# Altium PCB ESP32_CAN.PcbDoc
Units mil, origin at the board's own origin, x right, y up, seen from the top; angles counter-clockwise.
Board outline 3135 x 1300 mil, 2 copper layers (Top Layer, Bottom Layer); 54 components, 58 nets, 237 pads, 59 vias.
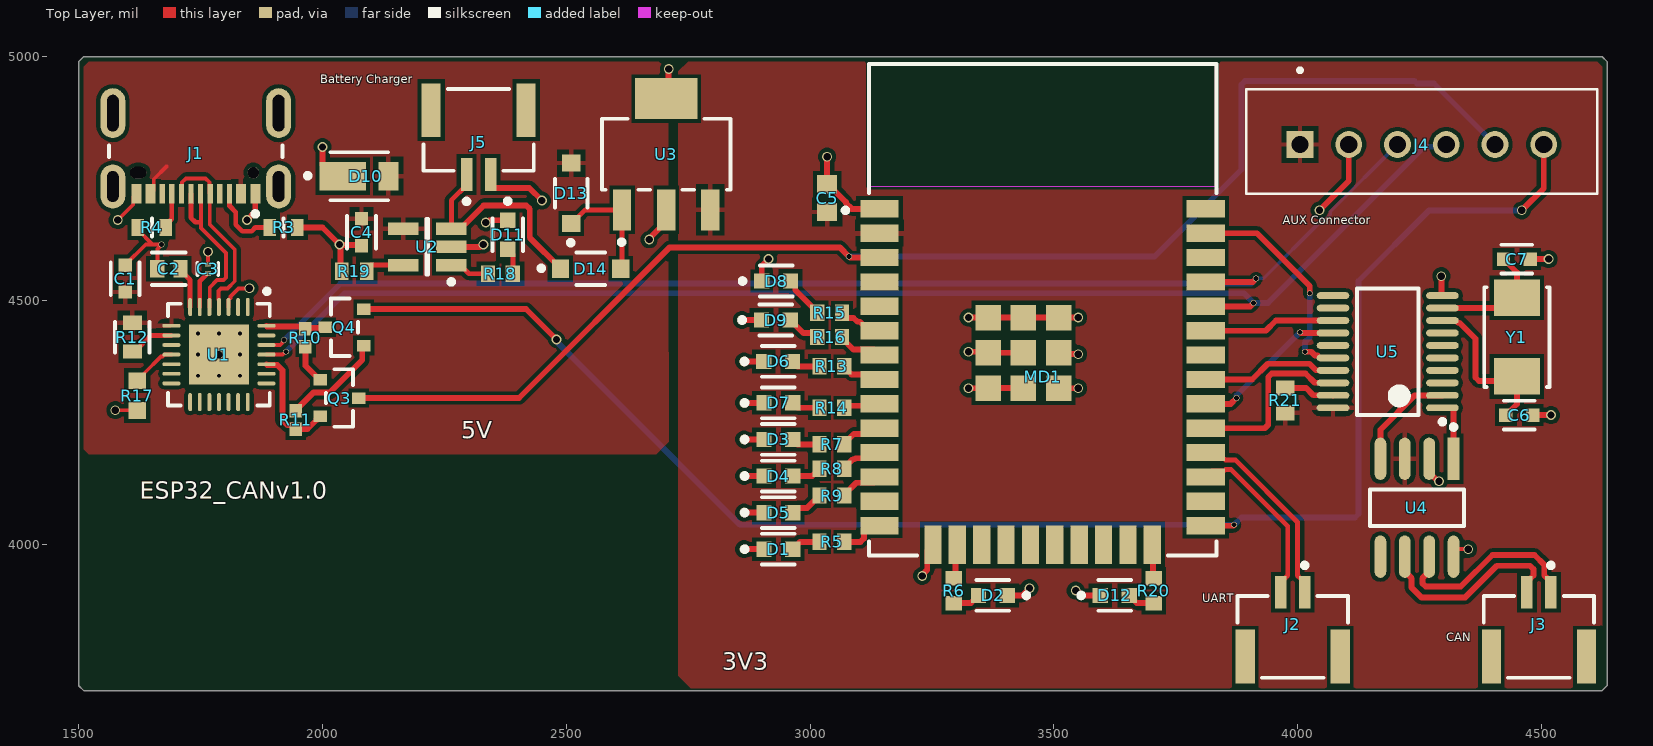
[diagram p0: Top Layer view]
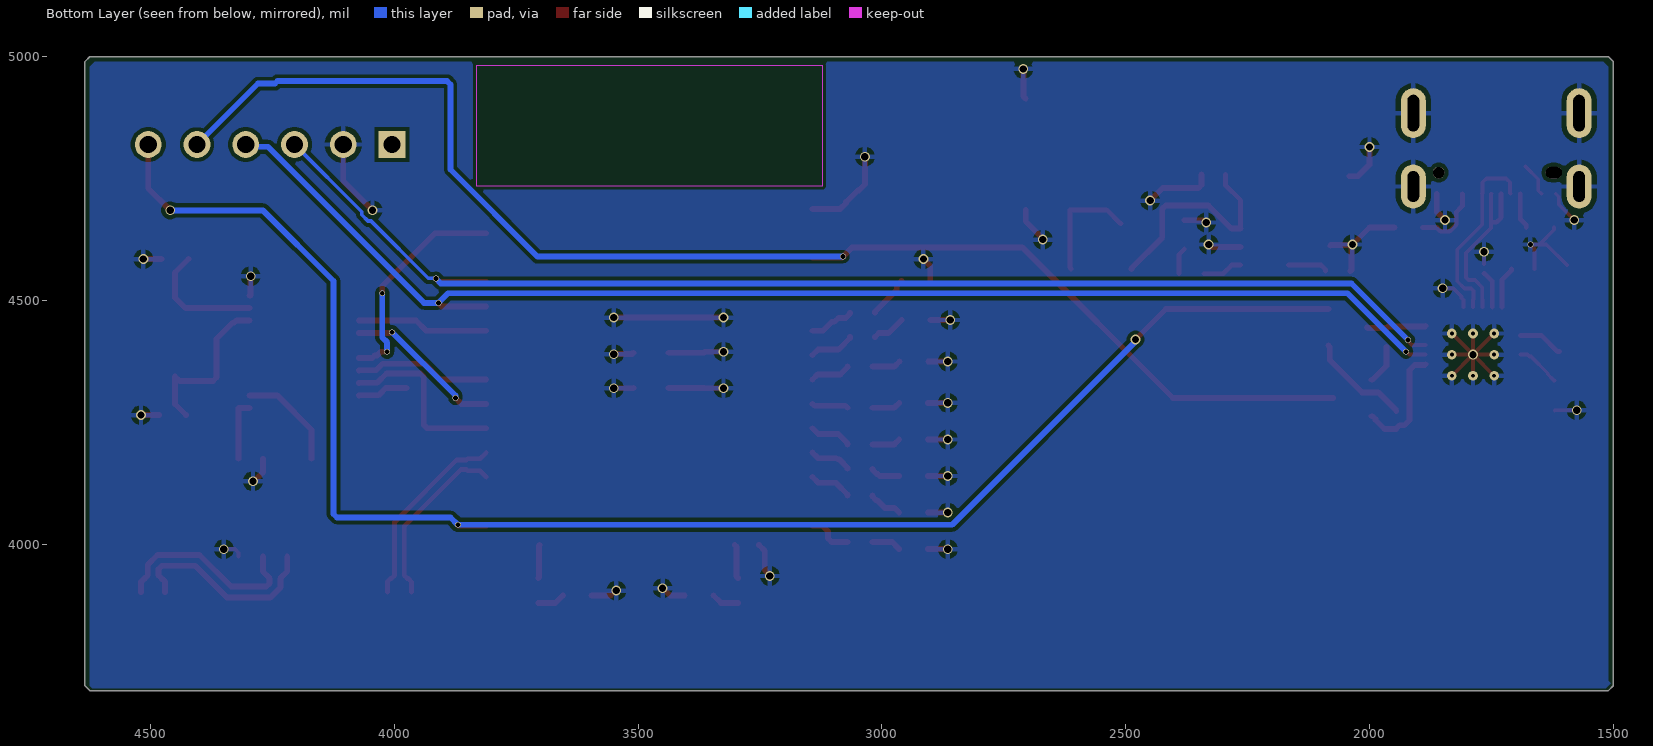
[diagram p1: Bottom Layer view, seen from below]
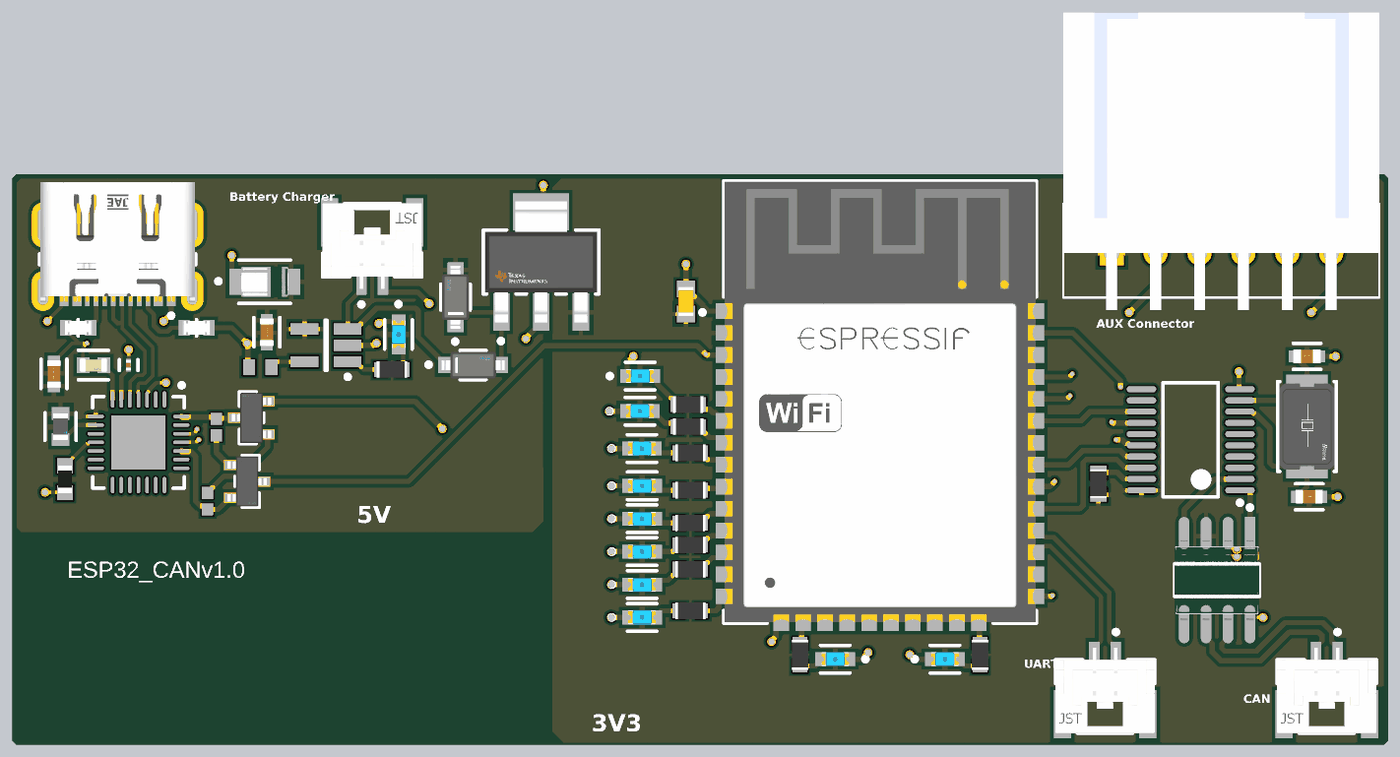
[diagram p2: 3D render of the assembled board from above, using the file's embedded part models]

## Layer stack, top to bottom
Top Solder: solder mask 0.4, Solder Resist, Dk 3.5
Top Layer: signal copper 1.4
Dielectric 1: dielectric 12.6, FR-4, Dk 4.8
Bottom Layer: signal copper 1.4
Bottom Solder: solder mask 0.4, Solder Resist, Dk 3.5

## Board outline
1500,3710 1500,4990 1510,5000 4625,5000 4635,4990 4635,3710 4625,3700 1510,3700

## Design rules (kind name [scope] priority, off if disabled: settings)
Clearance [All] p1: gap=8 ignorepadtopadclearanceinfootprint=FALSE
DiffPairsRouting [All] p1: maxlimit=10 minlimit=10 mostfreqgap=10 toplayer_minwidth=8 toplayer_maxwidth=15 toplayer_prefwidth=8 bottomlayer_minwidth=8 bottomlayer_maxwidth=15 bottomlayer_prefwidth=8 maxuncoupledlength=500
PolygonConnect [All] p1: connectstyle=Relief reliefconductorwidth=10 reliefentries=4 polygonreliefangle="90 Angle" airgapwidth=10
RoutingVias [All] p1: holewidth=12 width=15 viastyle="Through Hole" minholewidth=10 minwidth=12 maxholewidth=15 maxwidth=20
SolderMaskExpansion [All] p1: expansion=4 istentingtop=FALSE
Width [All] p1: maxlimit=12 minlimit=8 preferedwidth=10
29 further rules are at their usual default settings.

## Classes and differential pairs
differential pair UART: +UART_P -UART_N
differential pair D: +D_P -D_N
differential pair CAN: +CAN_P -CAN_N

## Components (designator, comment, footprint, x,y, rotation, side; value= is the part's Value field where it differs from the comment)
C1 "TMK107B7105KA-T" FP-0603-L_1_6_0_1-W_0_8_0-MFG 1595,4545 r90 top
C2 "C0603C104K5RACTU" FP-C0603C-CF-MFG 1685,4565 r180 top value="0.10 μF"
C3 "GRM033R60J104KE19D" FP-GRM033-0_03-MFG 1765,4565 r90 top
C4 "TMK107B7105KA-T" FP-0603-L_1_6_0_1-W_0_8_0-MFG 2080,4640 r270 top
C5 "GRM188R71H104KA93D" CAPC1608X90X35ML10T15 3035,4710 r90 top
C6 "C1608C0G1H220J080AA" FP-C1608-080-0_1-MFG 4455,4265 r0 top
C7 "C1608C0G1H220J080AA" FP-C1608-080-0_1-MFG 4450,4585 r0 top
D1 "LTST-C191TBKT" FP-LTST-C191TBKT-MFG 2935,3990 r0 top
D2 "LTST-C191TBKT" FP-LTST-C191TBKT-MFG 3375,3895 r180 top
D3 "LTST-C191TBKT" FP-LTST-C191TBKT-MFG 2935,4215 r0 top
D4 "LTST-C191TBKT" FP-LTST-C191TBKT-MFG 2935,4140 r0 top
D5 "LTST-C191TBKT" FP-LTST-C191TBKT-MFG 2935,4065 r0 top
D6 "LTST-C191TBKT" FP-LTST-C191TBKT-MFG 2934.53,4375 r0 top
D7 "LTST-C191TBKT" FP-LTST-C191TBKT-MFG 2935,4290 r0 top
D8 "LTST-C191TBKT" FP-LTST-C191TBKT-MFG 2930.47,4540 r0 top
D9 "LTST-C191TBKT" FP-LTST-C191TBKT-MFG 2930,4460 r0 top
D10 "DFLS1200Q-7" FP-PowerDI123-MFG 2074.96,4755 r180 top value=23pF
D11 "LTST-C191TBKT" FP-LTST-C191TBKT-MFG 2380,4635 r270 top
D12 "LTST-C191TBKT" FP-LTST-C191TBKT-MFG 3625,3895 r0 top
D13 "1N5819HW-7-F" FP-SOD123-MFG 2510,4720 r90 top
D14 "1N5819HW-7-F" FP-SOD123-MFG 2550,4565 r0 top
J1 "DX07S016JA1R1500" FP-DX07S016JA1R1500-MFG 1740,4845 r180 top
J2 "BM02B-GHS-TBT(LF)(SN)(N)" FP-BM02B-GHS-TBT_LF_SN-MFG 3990,3810 r0 top
J3 "BM02B-GHS-TBT(LF)(SN)(N)" FP-BM02B-GHS-TBT_LF_SN-MFG 4495,3810 r0 top
J4 "5-103414-4" TE_5-103414-4 4255,4820 r0 top
J5 "BM02B-GHS-TBT(LF)(SN)(N)" FP-BM02B-GHS-TBT_LF_SN-MFG 2320,4850 r180 top
MD1 "ESP32-WROOM-32D" FP-ESP32-WROOM-32D-MFG 3477.13,4480.94 r0 top
Q3 "BC817-25,215" FP-SOT23-MFG 2035,4300 r0 top
Q4 "BC817-25,215" FP-SOT23-MFG 2045,4445 r180 top
R3 "ERJ-3EKF5101V" FP-ERJ3EK-MFG 1920,4650 r0 top
R4 "ERJ-3EKF5101V" FP-ERJ3EK-MFG 1650,4650 r180 top
R5 "ERJ-3EKF2200V" RESC1608X55X30LL15T15 3045,4005 r180 top
R6 "ERJ-3EKF2200V" RESC1608X55X30LL15T15 3295,3905 r270 top
R7 "ERJ-3EKF2200V" RESC1608X55X30LL15T15 3045,4205 r180 top
R8 "ERJ-3EKF2200V" RESC1608X55X30LL15T15 3045,4155 r180 top
R9 "ERJ-3EKF2200V" RESC1608X55X30LL15T15 3045,4100 r180 top
R10 "CRCW040210K0FKEDHP" RESC1005X40X25ML05T10 1965,4423.7 r270 top
R11 "CRCW040210K0FKEDHP" RESC1005X40X25ML05T10 1945,4255 r90 top
R12 "CRCW06034K70FKEA" FP-CRCW0603-e3-MFG 1610,4425 r270 top
R13 "ERJ-3EKF2200V" RESC1608X55X30LL15T15 3045,4365 r180 top
R14 "ERJ-3EKF2200V" RESC1608X55X30LL15T15 3045,4280 r180 top
R15 "ERJ-3EKF2200V" RESC1608X55X30LL15T15 3040,4475 r180 top
R16 "ERJ-3EKF2200V" RESC1608X55X30LL15T15 3040,4425 r180 top
R17 "CR0603AFX-1002EAS" RESC1608X55N 1620,4305 r270 top
R18 "ERJ-3EKF2200V" RESC1608X55X30LL15T15 2365,4555 r0 top
R19 "RK73H1JTTD1001F" RESC1608X55X30LL20T10 2065,4560 r180 top
R20 "ERJ-3EKF2200V" RESC1608X55X30LL15T15 3705,3905 r270 top
R21 "CRCW060310K0FKEA" RESC1609X50X30NL8T20 3975,4295 r270 top
U1 "CP2102-GM" SLAB-QFN-28-3125x3125TP_M 1787.56,4389.06 r270 top
U2 "LTC4054ES5-4.2#TRMPBF" LT-S5-5-TSOT-23_M 2215,4610 r180 top
U3 "LM3940IMP-3.3/NOPB" FP-DCY0004A-MFG 2705,4800 r90 top
U4 "TJA1050T/CM,118" FP-SOT96-1-IPC_A 4245,4075 r270 top
U5 "MCP2515-I/ST" TSSOP-ST20_N 4185,4395 r180 top
Y1 "ABM3-8.000MHZ-D2Y-T" FP-ABM3-MFG 4450,4425 r270 top

## Footprints (in the part's own frame and the unit in brackets; to place one, negate y for a bottom-side part, rotate by r counter-clockwise, add the part's x,y. Pads: shape width x height; smd on the part's side, far side on the other; paste and mask are expansions set on the pad)
CAPC1608X90X35ML10T15 [mm] "Chip Capacitor, 2-Leads, Body 1.7x0.9mm, IPC Low Density"
  rect 0.95x1.05 smd: 1(-0.725,0) 2(0.725,0)
  body extent -0.85,-0.45 0.85,0.45, height 0.9
FP-0603-L_1_6_0_1-W_0_8_0-MFG [mm]
  rect 0.7x0.7 smd paste+0 mask+0: 1(-0.7,0) 2(0.7,0)
  silkscreen extent -0.85,-0.75 0.85,0.75, body extent -1.15,-0.55 1.15,0.55, height 0.25
FP-ABM3-MFG [mm]
  rect 1.9x2.4 smd paste+0 mask+0: 1(-2.05,0) 2(2.05,0)
  silkscreen extent -2.6,-1.7 2.6,1.7, body extent -3.1,-1.8 3.1,1.8, height 0.25
FP-BM02B-GHS-TBT_LF_SN-MFG [mm]
  rect 0.6x1.7 smd paste+0 mask+0: 1(0.625,2.325) 2(-0.625,2.325)
  rect 1x2.8 smd paste+0 mask+0: 3(-2.475,-1.025) 4(2.475,-1.025)
  silkscreen extent -2.88,-2.12 2.88,3.85, body extent -3.08,-2.52 3.08,3.27, height 0.25
FP-C0603C-CF-MFG [mm]
  rect 0.75x0.9 smd paste+0 mask+0: 1(-0.6,0) 2(0.6,0)
  silkscreen extent -0.87,-0.85 0.88,0.85, body extent -1.2,-0.6 1.2,0.6, height 0.25
FP-C1608-080-0_1-MFG [mm]
  rect 0.7x0.7 smd paste+0 mask+0: 1(-0.7,0) 2(0.7,0)
  silkscreen extent -0.8,-0.75 0.8,0.75, body extent -1.15,-0.55 1.15,0.55, height 0.25
FP-CRCW0603-e3-MFG [mm]
  rect 0.75x1 smd paste+0 mask+0: 1(-0.75,0) 2(0.75,0)
  silkscreen extent -0.8,-0.9 0.8,0.9, body extent -1.22,-0.6 1.22,0.6, height 0.25
FP-DCY0004A-MFG [mm]
  rect 2.15x0.95 smd paste+0 mask+0: 1(-2.9,2.3) 2(-2.9,0) 3(-2.9,-2.3)
  rect 2.15x3.25 smd paste+0 mask+0: 4(2.9,0)
  silkscreen extent -4.7,-3.35 1.85,3.35, body extent -4.08,-3.45 4.08,3.45, height 0.25
FP-DX07S016JA1R1500-MFG [mm]
  rrect100% 1.3x2.3 hole 1.6 slot 0.6 at 0 deg paste-2539.97 mask+0: 1(-4.32,2.825) 2(4.32,2.825)
  rrect100% 1.3x2.6 hole 1.9 slot 0.6 at 0 deg paste-2539.97 mask+0: 3(-4.32,-1) 6(4.32,-1)
  rect 0.52x1 smd paste+0 mask+0: A1/B12(-3.1,3.2) A4/B9(-2.35,3.2) A12/B1(3.1,3.2) B4/A9(2.35,3.2)
  rect 0.27x1 smd paste+0 mask+0: A5(-1.75,3.2) A6(-0.25,3.2) A7(0.75,3.2) A8(1.75,3.2) B5(1.25,3.2) B6(0.25,3.2) B7(-0.75,3.2) B8(-1.25,3.2)
  round 0.6 hole 0.6 unplated paste-2539.97 mask+0: ""(-3,2.1)
  rrect100% 0.85x0.6 hole 0.6 slot 0.85 at 0 deg unplated paste-2539.97 mask+0: ""(3,2.1)
  silkscreen extent -4.52,0.67 4.52,4.37, body extent -5.07,-3.75 5.07,4.08, height 0.25
FP-ERJ3EK-MFG [mm]
  rect 0.65x0.9 smd paste+0 mask+0: 1(-0.725,0) 2(0.725,0)
  silkscreen extent 0,-0.48 0,0.48, body extent -1.15,-0.58 1.15,0.58, height 0.25
FP-ESP32-WROOM-32D-MFG [mm]
  rect 2x0.9 smd paste+0 mask+0: 1(-8.5,5.26) 2(-8.5,3.99) 3(-8.5,2.72) 4(-8.5,1.45) 5(-8.5,0.18) 6(-8.5,-1.09) 7(-8.5,-2.36) 8(-8.5,-3.63) 9(-8.5,-4.9) 10(-8.5,-6.17) 11(-8.5,-7.44) 12(-8.5,-8.71) 13(-8.5,-9.98) 14(-8.5,-11.25) 25(8.5,-11.25) 26(8.5,-9.98) 27(8.5,-8.71) 28(8.5,-7.44) 29(8.5,-6.17) 30(8.5,-4.9) 31(8.5,-3.63) 32(8.5,-2.36) 33(8.5,-1.09) 34(8.5,0.18) 35(8.5,1.45) 36(8.5,2.72) 37(8.5,3.99) 38(8.5,5.26)
  rect 0.9x2 smd paste+0 mask+0: 15(-5.715,-12.25) 16(-4.445,-12.25) 17(-3.175,-12.25) 18(-1.905,-12.25) 19(-0.635,-12.25) 20(0.635,-12.25) 21(1.905,-12.25) 22(3.175,-12.25) 23(4.445,-12.25) 24(5.715,-12.25)
  rect 1.33x1.33 smd paste+0 mask+0: 39(-2.835,-4.075) 39(-2.835,-2.24) 39(-2.835,-0.405) 39(-1,-4.075) 39(-1,-2.24) 39(-1,-0.405) 39(0.835,-4.075) 39(0.835,-2.24) 39(0.835,-0.405)
  Keep-Out Layer region: -9,6.45 9,6.45 9,12.75 -9,12.75
  Keep-Out Layer region: -9,6.45 9,6.45 9,12.75 -9,12.75
  silkscreen extent -10.4,-12.8 9.05,12.8, body extent -9.6,-13.35 9.6,12.9, height 0.25
FP-GRM033-0_03-MFG [mm]
  rect 0.25x0.3 smd paste+0 mask+0: 1(-0.238,0) 2(0.238,0)
  silkscreen extent -0.32,-0.54 0.32,0.54, body extent -0.46,-0.27 0.46,0.27, height 0.25
FP-LTST-C191TBKT-MFG [mm]
  rect 0.8x0.8 smd paste+0 mask+0: 1(-0.75,0) 2(0.75,0)
  silkscreen extent -1.87,-0.8 0.85,0.8, body extent -1.25,-0.55 1.25,0.55, height 0.25
FP-PowerDI123-MFG [mm]
  rect 2.4x1.5 smd paste+0 mask+0: 1(0.85,0)
  rect 1.05x1.5 smd paste+0 mask+0: 2(-1.525,0)
  silkscreen extent -1.5,-1.25 2.8,1.25, body extent -2.15,-1.06 2.15,1.06, height 0.25
FP-SOD123-MFG [mm]
  rect 0.9x0.95 smd paste+0 mask+0: 1(-1.575,0) 2(1.575,0)
  silkscreen extent -2.7,-0.85 0.75,0.85, body extent -2.12,-0.95 2.12,0.95, height 0.25
FP-SOT23-MFG [mm]
  rect 0.7x0.6 smd paste-1000 mask+0: 1(-1,0.95) 2(-1,-0.95) 3(1,0)
  silkscreen extent -0.7,-1.5 0.7,1.5, body extent -1.5,-1.65 1.5,1.65, height 0.25
FP-SOT96-1-IPC_A [mil]
  rect 86.79x23.94 smd paste+0 mask+0: 1(-100.43,75)
  rrect100% 86.79x23.94 smd paste+0 mask+0: 2(-100.43,25) 3(-100.43,-25) 4(-100.43,-75) 5(100.43,-75) 6(100.43,-25) 7(100.43,25) 8(100.43,75)
  silkscreen extent -170,-96 37,96, body extent -164,-116 164,116, height 10
LT-S5-5-TSOT-23_M [mm] "SOT23, 5-Leads, Body 2.90x1.63mm, Pitch 0.95mm, IPC Low Density"
  rect 1.6x0.65 smd: 1(-1.25,0.95) 2(-1.25,0) 3(-1.25,-0.95) 4(1.25,-0.95) 5(1.25,0.95)
  silkscreen extent -1.38,-1.45 0.05,1.95, body extent -0.87,-1.45 0.87,1.45, height 1
RESC1005X40X25ML05T10 [mm] "Chip Resistor, 2-Leads, Body 1.00x0.50mm, IPC Low Density"
  rect 0.7x0.65 smd: 1(-0.475,0) 2(0.475,0)
  body extent -0.53,-0.27 0.53,0.28, height 0.4
RESC1608X55N [mm]
  rect 0.87x0.93 smd: 1(-0.78,0) 2(0.78,0)
  body extent -0.8,-0.4 0.8,0.4, height 0.55
RESC1608X55X30LL15T15 [mm] "Chip Resistor, 2-Leads, Body 1.75x0.95mm, IPC High Density"
  rect 0.75x0.85 smd: 1(-0.65,0) 2(0.65,0)
  body extent -0.87,-0.48 0.87,0.48, height 0.55
RESC1608X55X30LL20T10 [mm] "Chip Resistor, 2-Leads, Body 1.60x0.80mm, IPC High Density"
  rect 0.7x0.9 smd: 1(-0.65,0) 2(0.65,0)
  body extent -0.9,-0.5 0.9,0.5, height 0.55
RESC1609X50X30NL8T20 [mm] "Chip Resistor, 2-Leads, Body 1.65x0.95mm, IPC Medium Density"
  rect 0.8x0.95 smd: 1(-0.65,0) 2(0.65,0)
  body extent -0.82,-0.48 0.82,0.48, height 0.5
SLAB-QFN-28-3125x3125TP_M [mm] "QFN, 28-Leads, Body 5x5mm, Pitch 0.5mm, Thermal Pad 3.13x3.13mm, IPC Low Density"
  oval 0.95x0.2 smd: 1(-2.475,1.5) 2(-2.475,1) 3(-2.475,0.5) 4(-2.475,0) 5(-2.475,-0.5) 6(-2.475,-1) 7(-2.475,-1.5) 15(2.475,-1.5) 16(2.475,-1) 17(2.475,-0.5) 18(2.475,0) 19(2.475,0.5) 20(2.475,1) 21(2.475,1.5)
  oval 0.2x0.95 smd: 8(-1.5,-2.475) 9(-1,-2.475) 10(-0.5,-2.475) 11(0,-2.475) 12(0.5,-2.475) 13(1,-2.475) 14(1.5,-2.475) 22(1.5,2.475) 23(1,2.475) 24(0.5,2.475) 25(0,2.475) 26(-0.5,2.475) 27(-1,2.475) 28(-1.5,2.475)
  rect 3.13x3.13 smd: 29(0,0)
  silkscreen extent -3.42,-2.65 2.65,2.65, body extent -2.5,-2.5 2.5,2.5, height 1
TE_5-103414-4 [mm]
  rect 1.398x1.398 hole 0.89: 1(-6.35,0)
  round 1.398 hole 0.89: 2(-3.81,0) 3(-1.27,0) 4(1.27,0) 5(3.81,0) 6(6.35,0)
  silkscreen extent -9.14,-2.57 9.14,3.97, body extent -9.14,-2.88 9.14,2.87, height 13.94
TSSOP-ST20_N [mm] "TSOP, 20-Leads, Body 6.5x4.4mm, Pitch 0.65mm, IPC Medium Density"
  oval 1.7x0.35 smd: 1(-2.85,2.925) 2(-2.85,2.275) 3(-2.85,1.625) 4(-2.85,0.975) 5(-2.85,0.325) 6(-2.85,-0.325) 7(-2.85,-0.975) 8(-2.85,-1.625) 9(-2.85,-2.275) 10(-2.85,-2.925) 11(2.85,-2.925) 12(2.85,-2.275) 13(2.85,-1.625) 14(2.85,-0.975) 15(2.85,-0.325) 16(2.85,0.325) 17(2.85,0.975) 18(2.85,1.625) 19(2.85,2.275) 20(2.85,2.925)
  silkscreen extent -2.98,-3.3 1.6,3.77, body extent -2.25,-3.3 2.25,3.3, height 1.2

## Part data
C1 C4: library part CMP-2000-07259-3, "None", Capacitance=1uF, Case Code (Imperial)=0603, Case Code (Metric)=1608, Dielectric=X7R, Max Operating Temperature=125°C, Min Operating Temperature=-55°C, Package Quantity=1, Resistor Type=Ceramic, Tolerance=10%, Voltage Rating=25V, Case/Package=0603, Construction=Flat, Contact Plating=Tin, Depth=0.8mm, Halogen Free="Halogen Free", Height=0.8mm, Length=1.6mm, Mount="Surface Mount", Number of Pins=2, Packaging="Tape and Reel", Radiation Hardening=No, REACH SVHC="No SVHC", RoHS Compliant=Yes, Series=M, Termination=SMD/SMT, Thickness=0.035inch, Voltage Rating (DC)=25V, Width=0.031inch
C2: library part CMP-2006-03061-2, "CAP CER 0.1UF 50V X7R 0603", Capacitance="0.10 μF", Manufacturer=KEMET, Package=C0603C-CF, Temperature="-55°C to +125°C", Temperature Characteristic=X7R, Temperature Coefficient=30ppm/°C, Temperature Range High=+125°C, Temperature Range Low=-55°C, Tolerance=0.1, Voltage Rating="50 V", Automotive=Yes, Automotive Grade="Grade 1", Category=Cap, ComponentLink2Description=Datasheet, ComponentLink2URL=https://api.kemet.com/component-edge/download/datasheet/C0603C100J5GACAUTO.pdf, Device Class L1="Passive Components", Device Class L2=Capacitors, Device Class L3="Ceramic Capacitors", Digikey Description="CAP CER 0.1UF 50V X7R 0603", Height=0.87mm, Lead Free=Yes, Manufacturer Part Number=C0603C104K5RACTU, Material=Ceramic, Octopart=https://octopart.com/c0603c104k5ractu-kemet-139244, RoHS=TRUE
C3: library part CMP-06035-000062-2, "Chip Multilayer Ceramic Capacitors for General Purpose, 0201, 0.10uF, X5R, 15%, 10%, 6.3V", Capacitance=100nF, Case Code (Imperial)=0201, Case Code (Metric)=0603, Dielectric=X5R, Max Operating Temperature=85°C, Min Operating Temperature=-55°C, Package Quantity=1, Tolerance=10%, Voltage=6.3V, Case/Package=0201, Depth=0.3mm, Height=0.3mm, Lead Free="Lead Free", Length=0.6mm, Material=Ceramic, Mount="Surface Mount", Packaging="Tape and Reel", Radiation Hardening=No, REACH SVHC="No SVHC", Termination=SMD/SMT, Thickness=0.013inch, Voltage Rating=6.3V, Voltage Rating (DC)=6.3V, Weight=6E-06oz, Width=0.012inch
C5: library part CMP-2100-03643-1, "Chip Capacitor, 0.1 uF, +/- 10%, 50 V, -55 to 125 degC, 0603 (1608 Metric), RoHS, Tape and Reel", Capacitance=100nF, Case Code (Imperial)=0603, Case Code (Metric)=1608, Dielectric=X7R, Dielectric Material=Ceramic, Insulation Resistance=10GR, Manufacturer=Murata, Max Operating Temperature=125degC, Min Operating Temperature=-55degC, Package Description="2-Pin Surface Mount Device, Body 1.6 x 0.8 mm", Package Quantity=1, Tolerance=10%, Voltage=50V, Case/Package=0603, Contact Plating=Tin, Datasheet URL=http://psearch.en.murata.com/capacitor/product/GRM188R71H104KA93%23.pdf, Datasheet Version=42675.0, Depth=0.8mm, Height=0.8mm, Lead Free=LeadFree, Length=1.6mm, Manufacturer URL=http://www.murata.com/, Material=Ceramic, Mount=SurfaceMount, Number of Pins=2, Package Reference=0603, Packaging=TapeandReel, Radiation Hardening=No, REACH SVHC=NoSVHC, RoHSCompliant=true, Termination=SMD/SMT, Thickness=0.035inch, Voltage Rating=50V, Voltage Rating (DC)=50V, Width=0.8mm
C6 C7: library part CMP-2000-06024-2, "CAP CER 22PF 50V C0G 0603", Capacitance=22pF, Case Code (Imperial)=0603, Case Code (Metric)=1608, Dielectric=C0G, Dielectric Material=Ceramic, Max Operating Temperature=125°C, Min Operating Temperature=-55°C, Package Quantity=1, Temperature Coefficient=30ppm/°C, Tolerance=5%, Voltage=50V, Case/Package=0603, Construction=Flat, Depth=0.8mm, Height=0.8mm, Lead Free="Lead Free", Length=1.6mm, Mount="Surface Mount", Number of Pins=2, Packaging="Tape and Reel", Radiation Hardening=No, RoHS Compliant=Yes, Series=C, Termination=SMD/SMT, Thickness=0.037inch, Voltage Rating=50V, Voltage Rating (DC)=50V, Weight=7.1E-05oz, Width=0.031inch
D1 D2 D3 D4 D5 D6 D7 D8 D9 D11 D12: library part CMP-22017-000008-1, "LED BLUE CLEAR CHIP SMD", Case Code (Imperial)=0603, Case Code (Metric)=1608, Color=Blue, Forward Current=20mA, Forward Voltage=3.8V, Lens Color=Colorless, Max Operating Temperature=80°C, Max Power Dissipation=75mW, Min Operating Temperature=-20°C, Package Quantity=1, Power Dissipation=76mW, Reverse Voltage=5V, Case/Package=0603, Depth=1.6mm, Dominant Wavelength=475nm, Height=0.55mm, Illumination Color=Blue, Lead Free="Lead Free", Length=0.8mm, Lens Style=Diffused, Lens Transparency=Clear, Luminous Intensity=180mcd, Mount="Surface Mount", Number of Elements=1, Number of LEDs=1, Number of Pins=2, Packaging="Tape and Reel", Radiation Hardening=No, Test Current=20mA, Viewing Angle=130°, Wavelength=468nm, Width=0.8mm
D10: library part CMP-12790-000008-1, "DIODE SCHOTTKY 200V POWERDI123", Capacitance=23pF, Forward Current=1A, Manufacturer=Diodes, Max Junction Temp=+150°C, Max Repetitive Reverse Voltage=200V, Max Surge Forward Current=40A, Package=PowerDI123, Peak Reverse Current=2uA, Temperature="-55°C to +150°C", Temperature Range Low=-55°C, Automotive=Yes, Automotive Grade="Grade 0", Category=Diode, ComponentLink2Description=Datasheet, ComponentLink2URL=https://www.diodes.com/assets/Datasheets/DFLS1200Q.pdf, Device Class L1="Discrete Semiconductors", Device Class L2=Diodes, Device Class L3="Schottky Diodes", Digikey Description="DIODE SCHOTTKY 200V POWERDI123", Footprint Url=https://www.diodes.com/assets/Package-Files/PowerDI123.pdf, Height=1mm, Lead Free=Yes, Manufacturer Part Number=DFLS1200Q-7, Mouser Description="DFLS1200Q Series 200 V 1 A High Voltage Schottky Barrier Rectifier - POWERDI®123", Octopart=https://octopart.com/dfls1200q-7-diodes+inc.-46962012, Reverse Voltage=200V, RoHS=TRUE, Temperature Range High=+150°C
D13 D14: library part CMP-0303-00003-3, "DIODE SCHOTTKY 40V 1A SOD123", Average Rectified Current=1A, Capacitance=110pF, Case/Package=SOD-123-2, Forward Voltage=450mV, Max Forward Surge Current (Ifsm)=25A, Max Operating Temperature=125°C, Max Power Dissipation=450mW, Max Repetitive Reverse Voltage (Vrrm)=40V, Min Operating Temperature=-65°C, Package Quantity=3000, Peak Reverse Current=50uA, Contact Plating=Tin, Current Rating=1A, Element Configuration=Single, Forward Current=1A, Height=1.25mm, Lead Free="Lead Free", Length=2.85mm, Max Reverse Voltage (DC)=40V, Number of Pins=2, Output Current=1A, Packaging="Tape and Reel", Peak Non-Repetitive Surge Current=25A, Polarity=Standard, Radiation Hardening=No, REACH SVHC="No SVHC", Termination=SMD/SMT, Voltage Rating (DC)=40V, Weight=0.000353oz, Width=1.7mm
J1: library part CMP-00000-1, "USB Connector, 16 Contact(s), Female, Right Angle, Surface Mount Terminal, Locking, Receptacle", Current Rating=5A, Insulation Color=Black, Max Operating Temperature=85°C, Min Operating Temperature=-40°C, Voltage Rating=20V, Connector Type=USB, Contact Material=Nickel,Gold, Contact Plating=Gold, Gender=Receptacle, Height=3.31mm, Mating Cycles=10000, Mounting Technology="Surface Mount,Through Hole,Horizontal", Number of Contacts=16, Number of Ports=1, Series=DX07, Shielding=Shielded, Termination=Solder, USB Standard="USB 2.0"
J2 J3 J5: library part CMP-2000-05957-2, "CONN HEADER SMD 2POS 1.25MM", Color=Natural, Connector Type="Outer Shroud Contact", Contact Plating=Tin, Fastening Type=Ramp, Lead Free="Lead Free", Mount="Surface Mount", Number of Positions=2, Number of Rows=1, Packaging="Tape and Reel", Pitch=0.049inch, Termination=Solder
J4: "06 MODII HDR SRST SHRD LF", Package=None, Availability=Unavailable, MF="{'manufacturer': u'TE Connectivity'}", MP=5-103414-4, Price=None
MD1: library part CMP-194065-000003-1, "WIFI MODULE 32MBITS SPI FLASH", Manufacturer="Espressif Systems", Max Frequency=2484MHz, Max Supply Voltage=3.6V, Min Supply Voltage=3V, Nominal Supply Current=500mA, Temperature="-40°C to +85°C", Temperature Range High=+85°C, Temperature Range Low=-40°C, Automotive=No, Bandwidth=72MHz, Category=UNK, ComponentLink2Description=Datasheet, ComponentLink2URL=https://www.espressif.com/sites/default/files/documentation/esp32-wroom-32d_esp32-wroom-32u_datasheet_en.pdf, Data Rate=150Mbits/s, Device Class L1="Integrated Circuits (ICs)", Device Class L2="RF Semiconductors and Devices", Device Class L3=Transceivers, Digikey Description="WIFI MODULE 32MBITS SPI FLASH", Height=3.2mm, Interface=I2C,SPI,UART,Ethernet,I2S,Other, Lead Free=Yes, Manufacturer Part Number=ESP32-WROOM-32D, Mouser Description="Wi-Fi/BT BLE Module ESP32-D0WD, SPI Flash, UART, P", Number Of Adc Channels=16, Number Of Gpio=32, Octopart=https://octopart.com/esp32-wroom-32d-espressif+systems-91040050, Package=ESP32-WROOM-32D, RoHS=TRUE, Sensitivity=-98dBm
Q3 Q4: library part CMP-14406-000029-1, "TRANS NPN 45V 500MA TO236AB", RoHS Compliant=Yes
R3 R4: library part CMP-2000-00540-8, "RES SMD 5.1K OHM 1% 1/10W 0603", Case Code (Imperial)=0603, Case Code (Metric)=1608, Max Operating Temperature=155°C, Max Power Dissipation=100mW, Min Operating Temperature=-55°C, Package Quantity=1, Resistance=5.1kR, Resistance Tolerance=1%, Resistor Type="Thick Film", Temperature Coefficient=100ppm/°C, Voltage Rating=75V, Case/Package=0603, Construction=Rectangular, Contact Plating=Tin, Depth=0.8mm, Features="Automotive AEC-Q200", Height=0.022inch, Lead Free="Lead Free", Length=1.6mm, Military Standard=Not, Mount="Surface Mount", Number of Terminations=2, Packaging="Tape and Reel", Power Rating=100mW, Radiation Hardening=No, Reach SVHC Compliant=Yes, RoHS Compliant=Yes, Series=ERJ, Size Code=0603, Termination=SMD/SMT, Tolerance=1%, Voltage Rating (DC)=75V, Weight=7.1E-05oz, Width=0.8mm
R5 R6 R7 R8 R9 R13 R14 R15 R16 R18 R20: library part CMP-2000-00335-2, "Chip Resistor, 220 Ohm, +/- 1%, 0.1 W, -55 to 155 degC, 0603 (1608 Metric), RoHS, Tape and Reel", Case Code (Imperial)=0603, Case Code (Metric)=1608, Max Operating Temperature="155 degC", Min Operating Temperature="-55 degC", Package Quantity=5000, Power Rating="100 mW", Resistance="22 Ohm", Tolerance=1%, Voltage Rating="50 V", Case\Package=0603, ComponentLink1Description="Manufacturer URL", ComponentLink1URL=http://www.panasonic.com/, ComponentLink2Description=Datasheet, ComponentLink2URL=http://industrial.panasonic.com/cdbs/www-data/pdf/RDA0000/AOA0000C86.pdf, DatasheetVersion=Apr-15, Height="0.45 mm", Length="1.6 mm", Mount="Surface Mount", PackageDescription="2-Pin Surface Mount Device, Body 1.6 x 0.85 mm", PackageReference=0603, Packaging="Tape and Reel", Pins=2, REACH SVHC="No SVHC", RoHSCompliant=true, Voltage Rating (DC)="50 V", Width="0.8 mm"
R10 R11: library part CMP-2002-03043-1, Manufacturer="Vishay Dale", Part Number=CRCW040210K0FKEDHP
R12: library part CMP-1666-00019-3, "RES Thick Film, 4.7kΩ, 1%, 0.1W, 100ppm/°C, 0603", Case Code (Imperial)=0603, Case Code (Metric)=1608, Max Operating Temperature=155°C, Min Operating Temperature=-55°C, Package Quantity=5000, Power Rating=100mW, Resistance=4.7kR, Temperature Coefficient=100ppm/°C, Tolerance=1%, Voltage Rating=75V, Case/Package=0603, Composition="Thick Film", Contact Plating=Tin, Depth=0.85mm, Height=0.45mm, Lead Free="Lead Free", Length=1.55mm, Military Standard=Not, Mount="Surface Mount", Packaging="Tape and Reel", Termination=SMD/SMT, Voltage Rating (DC)=75V, Weight=7.1E-05oz, Width=0.85mm
R17: Package=None, Availability=Unavailable, MF="{'manufacturer': u'Bourns'}", MP=CR0603AFX-1002EAS, Price=None
R19: library part CMP-2000-01098-1, Manufacturer="KOA Speer", Part Number=RK73H1JTTD1001F
R21: library part CMP-1666-00005-4, "Chip Resistor, 10 KOhm, +/- 1%, 100 mW, -55 to 155 degC, 0603 (1608 Metric), RoHS, Tape and Reel", Manufacturer="Vishay Semiconductor", Max Operating Temperature="155 degC", Min Operating Temperature="-55 degC", Package Quantity=5000, Voltage Rating="75 V", ComponentLink1Description="Manufacturer URL", ComponentLink1URL=http://www.vishay.com/, ComponentLink2Description=Datasheet, ComponentLink2URL=https://datasheet.ciiva.com/11809/0900766b80d98afc-11809037.pdf, DatasheetVersion=06/2012, Height="0.45 mm", Length="1.55 mm", Mounting Technology="Surface Mount", PackageDescription="2-Pin Surface Mount Device, Body 1.575 x 0.85 mm", PackageReference=0603, Packaging="Tape and Reel", REACH SVHC=Unknown, RoHSCompliant=true
U1: library part CMP-0511-00012-1, "Single-Chip USB to UART Bridge, 1024 Bytes EEPROM, -40 to 85 degC, 28-pin QFN, Tube", Manufacturer="Silicon Labs", Code_IPC=J-STD-020C, Code_JEDEC=MO-220, ComponentLink1Description="Manufacturer URL", ComponentLink1URL=http://www.silabs.com/, ComponentLink2Description=Datasheet, ComponentLink2URL=http://www.silabs.com/Support%20Documents/TechnicalDocs/CP2102-9.pdf, ComponentLink3Description="Package Specification", ComponentLink3URL=http://www.silabs.com/Support%20Documents/TechnicalDocs/C8051T61x.pdf, DatasheetVersion="Rev. 1.5", EEPROM="1024 Bytes", Internal Oscillator=TRUE, Mounting Technology="Surface Mount", PackageDescription="28-Pin Quad-Flat No-Leads Package, Body 5 x 5 mm, Pitch 0.5 mm", PackageReference=QFN-28, PartNumber=CP2102-GM, Sub-Family="USB Bridges"
U2: library part CMP-0471-00454-1, "Standalone Linear Li-Ion Battery Charger with Thermal Regulation, 4.25 to 6.5 V Vin, 5-pin SOT23 (S5-5), -40 to 85 degC, Pb-Free, Mini Tape and Reel", Float Voltage="4.2 V", Manufacturer="Linear Technology", Max Charge Current(A)=0.8, Battery Chemistry="Li-Ion, Li-Polymer", Charge Termination=C/10, Code_JEDEC=MO-193, ComponentLink1Description="Manufacturer URL", ComponentLink1URL=http://www.linear.com/, ComponentLink2Description=Datasheet, ComponentLink2URL=http://cds.linear.com/docs/en/datasheet/405442xf.pdf, ComponentLink3Description="Package Specification", ComponentLink3URL=http://cds.linear.com/docs/en/packaging/SOT_5_05-08-1635.pdf, Mounting Technology="Surface Mount", Number of Cells=1, PackageDescription="5-Pin Plastic TSOT-23, Body 1.63 x 2.90 mm, Pitch 0.95 mm", PackageReference=S5-5, PackageVersion=Jun-10, Packing="Mini Tape and Reel", PartNumber=LTC4054ES5-4.2#TRMPBF, RoHS=TRUE, Type of Charger=Linear, Vin Max(V)=6.5, Vin Min(V)=4.25
U3: library part CMP-0062-01788-4, "IC REG LINEAR 3.3V 1A SOT223-4", Case/Package=SOT-223, Current Rating=1A, Dropout Voltage=500mV, Max Input Voltage=7.5V, Max Operating Temperature=125°C, Max Output Voltage=3.3V, Min Input Voltage=4.5V, Min Operating Temperature=-40°C, Package Quantity=1000, Quiescent Current=15mA, Contact Plating=Tin, Height=1.6mm, Lead Free="Lead Free", Length=6.5mm, Max Output Current=1A, Max Supply Voltage=7.5V, Min Supply Voltage=4.5V, Mount="Surface Mount", Nominal Output Voltage=3.3V, Number Of Outputs=1, Number of Pins=4, Number of Regulators=1, Output Configuration=Positive, Output Current=1A, Output Type=Fixed, Output Voltage=3.3V, Packaging="Tape and Reel", Polarity=Positive, Radiation Hardening=No, REACH SVHC="No SVHC", Series=-, Termination=SMD/SMT, Width=3.56mm
U4: library part CMP-2000-04923-2, "IC TRANSCEIVER HALF 1/1 8SO", Case/Package=SO, Max Operating Temperature=150°C, Max Supply Current=10mA, Max Supply Voltage=5.25V, Min Operating Temperature=-40°C, Min Supply Voltage=4.75V, Package Quantity=2500, Contact Plating=Gold, Data Rate=1Mbps, Interface=CAN, Lead Free="Lead Free", Mount="Surface Mount", Nominal Supply Current=10mA, Number of Pins=8, Number of Receive Buffers=1, Number of Transceivers=1, Number of Transmit Buffers=1, Packaging="Tape and Reel", Radiation Hardening=No, REACH SVHC="No SVHC", Receiver Hysteresis=70mV, Simplex/Duplex="Half Duplex"
U5: library part CMP-0186-00077-2, "Stand-Alone CAN Controller With SPI Interface, 20-Pin TSSOP, Industrial Temperature", Code_JEDEC=MO-153-AC, ComponentLink1Description="Manufacturer URL", ComponentLink1URL=http://www.microchip.com/, ComponentLink2Description=Datasheet, ComponentLink2URL=http://ww1.microchip.com/downloads/en/DeviceDoc/21801f.pdf, ComponentLink3Description="Package Specification", ComponentLink3URL=http://www.microchip.com/stellent/groups/techpub_sg/documents/packagingspec/en012702.pdf, DatasheetVersion="revF, Oct-2010", PackageDescription="20-Lead Plastic Thin Shrink Small Outline (ST) - 4.4mm Body [TSSOP]", PackageReference=TSSOP-ST20, PackageVersion="revBB, Aug-2009", RevisionNote="URLs added. DatasheetVersion updated."
Y1: library part CMP-2000-05033-2, "Crystal 8MHz ±20ppm 18pF SMD-2 5mm x 3.2mm", Case/Package=CSMD, ESR (Equivalent Series Resistance)=140R, Frequency=8MHz, Frequency Stability=30ppm, Frequency Tolerance=20ppm, Load Capacitance=18pF, Max Operating Temperature=85°C, Min Operating Temperature=-40°C, Package Quantity=1000, Resistor Type=Ceramic, Series Resistance=500R, Depth=3.2mm, Height=0.051inch, Lead Free="Lead Free", Length=5mm, Mount="Surface Mount", Number of Pins=2, Packaging="Tape and Reel", Radiation Hardening=No, RoHS Compliant=Yes, Termination=SMD/SMT, Tolerance=20ppm, Width=3.2mm

## Via types
v1: diameter 20, hole 15, Top Layer to Bottom Layer, 39 vias
v2: diameter 12, hole 10, Top Layer to Bottom Layer, 11 vias
v3: diameter 19.68, hole 7.87, Top Layer to Bottom Layer, 9 vias

## Nets (pads, with @x,y where several pads share a name; then routed paths per layer and width w, separated by ;. In a path a pad name is that pad's centre, name@x,y a point inside that pad or via, vN(x,y) a via of type N, cw(c..) or ccw(c..) an arc to the next point about the centre after c; other vN are vias at no path point)
3V3_MC: C5.1 J4.1 MD1.2 R21.2 U3.3 U4.3 U5.20
+5: C1.1 C4.1 D10.2 D13.2 J1.A4/B9 J1.B4/A9 R12.1 U1.8 U2.4 | length 69.5
  Top Layer w8: J1.B4/A9 1653.72,4725.25 1653.72,4748.72 1680,4775
BAT: D14.1 J5.1 U2.3 | length 456.5
  Top Layer w10: U2.3 2264.21,4705.63 2295.39,4736.81 J5.1
  Top Layer w12: U2.3 2282.91,4647.4 2330.51,4695 2417.97,4695 2425,4687.97 2425,4628.98 2487.99,4565.98 D14.1
CAN_N: J3.2 U4.6 | length 410.8
  Top Layer w12: U4.6 4220,3944.15 4234,3930.15 4234,3911.09 4253.92,3891.18 4344.02,3891.18 4408.87,3956.03 4476.97,3956.03 4484,3949 4484,3936.03 4476.97,3929 4476.2,3929 4470.39,3923.19 J3.2
CAN_P: J3.1 U4.7 | length 410.8
  Top Layer w12: U4.7 4270,3944.15 4256,3930.15 4256,3920.21 4263.03,3913.18 4334.9,3913.18 4399.76,3978.03 4486.08,3978.03 4506,3958.11 4506,3936.03 4513.03,3929 4513.8,3929 4519.61,3923.19 J3.1
"CHRG bar": R18.1 U2.1 | length 82.5
  Top Layer w10: U2.1 2282.91,4572.6 2300.51,4555 R18.1
CLK: MD1.30 U5.14 | length 325.5
  Top Layer w12: MD1.30 3863.03,4288.03 v2(3875,4300) ; v2(4005,4435) 4006.61,4433.39 U5.14
  Bottom Layer w12: v2(3875,4300) 3875,4305 v2(4005,4435)
CS: MD1.29 U5.18 | length 373.1
  Top Layer w12: MD1.29 3932.97,4238.03 3940,4245.06 3940,4343.31 3947.03,4350.34 4016.23,4350.34 4035.2,4331.36 4072.45,4331.36 U5.18
D_N: J1.A7 J1.B7 U1.4 | length 387.5
  Top Layer w8: J1.A7 1711.79,4720.33 1711.79,4742.62 1719.87,4750.7 1760.13,4750.7 1768.21,4742.62 1768.21,4720.33 J1.B7 1768.69,4718.17 1768.69,4656.31 1820,4605 1820,4539.5 1804.77,4524.27 1791.4,4524.27 1786.72,4519.58 1786.72,4501.98 1787.56,4501.13 U1.4
D_P: J1.A6 J1.B6 U1.5 | length 348.8
  Top Layer w8: J1.A6 1750.69,4718.17 1750.69,4660.47 1750.69,4648.86 1802,4597.54 1802,4546.95 1797.31,4542.27 1783.95,4542.27 1768.72,4527.04 1768.72,4501.98 1767.87,4501.13 U1.5
  Top Layer w10: J1.B6 1730,4718.86 1730,4670 1739.53,4660.47 1749.69,4660.47
DTR_bar: Q4.3 R10.1 U1.28 | length 124.1
  Top Layer w12: U1.28 1886.75,4446.36 1961.04,4446.36 R10.1 1966.3,4443.7 2004.33,4443.7 Q4.3
EN: J4.5 MD1.3 Q3.3 | length 2834.9
  Top Layer w12: Q3.3 2403.22,4300 2712.22,4609 3061,4609 v2(3080,4590) 3081.97,4588.03 MD1.3
  Bottom Layer w12: v2(3080,4590) 3706.37,4590 3885,4768.63 3885,4942.97 3892.03,4950 4240,4950 4245,4945 4280,4945 J4.5
GND: C1.2 C2.2 C3.2 C4.2 C5.2 C6.2 C7.2 D1.1 D2.1 D3.1 D4.1 D5.1 D6.1 D7.1 D8.1 D9.1 D10.1 D11.1 D12.1 J1.1 J1.2 J1.3 J1.6 J1.A1/B12 J1.A12/B1 J4.2 J5.2 MD1.1 MD1.15 MD1.39 R3.2 R4.2 R17.2 R19.2 U1.3 U1.29 U2.2 U3.2 U3.4 U4.2 U4.8 U5.10 | length 3170.6
  Top Layer w8: v1(1575,4275) 1619.29,4275 R17.2 ; v1(1580,4665) 1611.72,4696.72 1611.72,4712.78 J1.A12/B1 ; C1.2 1637.44,4615 1651.54,4615 ; R4.2 1621.46,4645.08 1651.54,4615 ; C2.2 1661.38,4605.3 1670,4613.92 v2(1670,4615) 1651.54,4615 ; v3(1744.25,4345.75) v3(1787.56,4389.06) ; v3(1744.25,4389.06) v3(1787.56,4389.06) ; v3(1744.25,4432.36) v3(1787.56,4389.06) ; C3.2 v1(1765,4600) ; v3(1787.56,4345.75) v3(1787.56,4389.06) ; v3(1787.56,4432.36) v3(1787.56,4389.06) ; U1.3 1807.24,4501.13 1810.99,4504.88 1810.99,4507.86 1828,4524.87 1849.87,4524.87 v1(1850,4525) ; v3(1830.87,4345.75) v3(1787.56,4389.06) ; v3(1830.87,4389.06) v3(1787.56,4389.06) ; v3(1830.87,4432.36) v3(1787.56,4389.06) ; U4.8 4320,3982.64 4327.36,3990 v1(4350,3990)
  Top Layer w12: v1(1845,4665) 1862.05,4682.05 J1.A1/B12 ; R3.2 2000,4650 v1(2035,4615) v1@2036.28,4613.72 ; v1(2000,4815) 2000.25,4814.75 2000.25,4778.53 2023.78,4755 D10.1 ; R19.2 2036.53,4562.88 2036.53,4613.47 v1@2036.28,4613.72 ; C4.2 2078.72,4613.72 v1@2036.28,4613.72 ; U2.2 2322.84,4610 2327.84,4615 v1(2330,4615) ; v1(2335,4660) 2337.16,4660 2341.69,4664.53 D11.1 ; J5.2 2344.61,4736.81 2350.42,4731 2424,4731 v1(2450,4705) ; v1(2670,4625) 2671.53,4626.53 2671.53,4628.74 2705,4662.2 U3.2 ; U3.4 2710,4919.17 v1(2710,4975) ; v1(2860,4460) D9.1 ; v1(2865,3990) D1.1 ; v1(2865,4065) D5.1 ; v1(2865,4140) D4.1 ; v1(2865,4215) D3.1 ; v1(2865,4290) D7.1 ; v1(2865,4375) D6.1 ; D8.1 2900.94,4570.94 v1(2915,4585) ; v1(3035,4795) C5.2 3047.7,4725.84 3049.78,4725.84 3073.49,4702.14 3073.49,4700.05 3085.51,4688.03 MD1.1 ; v1(3230,3935) 3230,3937.16 3240.41,3947.57 3240.41,3986.94 MD1.15 ; v1(3325,4320) 3365,4320 3365.51,4320.51 MD1.39@3437.76,4320.51 ; v1(3325,4395) 3363.27,4395 3365.51,4392.76 MD1.39@3437.76,4392.76 ; v1(3325,4465) 3365.51,4465 3437.76,4465 3510,4465 v1(3550,4465) ; D2.1 3435,3895 v1(3450,3910) ; MD1.39@3510,4320.51 3510.51,4320 v1(3550,4320) ; MD1.39@3510,4392.76 3512.76,4390 v1(3550,4390) ; v1(3545,3905) 3547.16,3905 3557.16,3895 D12.1 ; v1(4045,4685) 4105,4745 J4.2 ; U4.2 4270,4147.23 4286.44,4130.79 4288.72,4130.79 v1(4290.25,4129.26) ; v1(4295,4550) 4295,4510.98 4295.82,4510.16 U5.10 ; C7.2 v1(4515,4585) ; C6.2 v1(4520,4265)
  other v1: 1787.56,4389.06
INT: MD1.33 U5.13 | length 269.7
  Top Layer w12: MD1.33 3934.97,4438.03 3955.91,4458.98 U5.13
IO0: J4.6 MD1.25 Q4.2 | length 3321
  Top Layer w12: Q4.2 2417.6,4482.4 v1(2480,4420) ; MD1.25 3868.03,4038.03 v2(3870,4040) ; v1(4460,4685) 4505,4730 J4.6
  Bottom Layer w12: v1(2480,4420) 2481.53,4418.47 2481.53,4414.53 2856.06,4040 v2(3870,4040) 3885,4055 4117.97,4055 4125,4062.03 4125,4540 4270,4685 v1(4460,4685)
LED: MD1.24 R20.1 | length 69.3
  Top Layer w12: MD1.24 3703.56,3997.22 3703.56,3932.03 R20.1
LED1: MD1.14 R5.1 | length 93.9
  Top Layer w12: R5.1 3103.35,4005 3110.38,4012.03 3110.38,4026.31 3122.1,4038.03 MD1.14
LED2: MD1.16 R6.1 | length 71
  Top Layer w12: R6.1 3298.56,3934.15 3298.56,3995.1 MD1.16
LED3: MD1.10 R7.1 | length 86.7
  Top Layer w12: R7.1 3070.59,4206.97 3089.94,4226.31 3130.76,4226.31 MD1.10
LED4: MD1.11 R8.1 | length 86.7
  Top Layer w12: R8.1 3070.59,4156.97 3087.89,4174.27 3091.15,4174.27 3093.2,4176.31 3130.76,4176.31 MD1.11
LED5: MD1.12 R9.1 | length 88.8
  Top Layer w12: R9.1 3070.59,4101.97 3094.94,4126.31 3130.76,4126.31 MD1.12
LED6: MD1.8 R13.1 | length 84.2
  Top Layer w12: R13.1 3070.59,4363.03 3085.11,4348.51 3132,4348.51 MD1.8
LED7: MD1.9 R14.1 | length 75.2
  Top Layer w12: R14.1 3074.61,4284.02 3138.46,4284.02 MD1.9
LED8: MD1.6 R15.1 | length 93.4
  Top Layer w12: R15.1 3065.59,4473.03 3074.35,4464.27 3089.36,4464.27 3097.31,4456.31 3102.54,4456.31 3120.83,4438.03 MD1.6
LED9: MD1.7 R16.1 | length 93.4
  Top Layer w12: R16.1 3065.59,4423.03 3088.87,4399.75 3130.76,4399.75 MD1.7
MISO: MD1.31 U5.17 | length 280.1
  Top Layer w12: MD1.31 3906.44,4338.03 3938.75,4370.34 4024.51,4370.34 4037.9,4356.95 4072.45,4356.95 U5.17
MOSI: MD1.37 U5.16 | length 460.2
  Top Layer w12: MD1.37 3916.97,4638.03 4025,4530 v2(4025,4515) ; v2(4015,4395) 4028.14,4395 4036.23,4386.91 4041.04,4386.91 4045.74,4382.2 U5.16
  Bottom Layer w12: v2(4015,4395) 4015,4414.14 4025,4424.14 v2(4025,4515)
NetC2_1: C2.1 U1.7 | length 86.7
  Top Layer w10: C2.1 1708.62,4562.05 1728.5,4542.17 U1.7
NetC3_1: C3.1 U1.6 | length 76.6
  Top Layer w10: U1.6 1748.19,4539.67 1764.17,4555.65 C3.1
NetC6_1: C6.1 U5.8 Y1.2 | length 343.3
  Top Layer w12: U5.8 4324.26,4458.98 4328.96,4454.28 4332.43,4454.28 4365,4421.71 4365,4342.03 4372.03,4335 4440.71,4335 Y1.2 4450,4287.56 C6.1
NetC7_1: C7.1 U5.9 Y1.1 | length 252.3
  Top Layer w12: U5.9 4428.86,4484.57 Y1.1 4450,4557.44 C7.1
NetD1_2: D1.2 R5.2 | length 61.1
  Top Layer w12: D1.2 2979.53,4005 R5.2
NetD2_2: D2.2 R6.2 | length 56.9
  Top Layer w12: R6.2 3329.88,3879.41 D2.2
NetD3_2: D3.2 R7.2 | length 59
  Top Layer w12: D3.2 2974.53,4205 R7.2
NetD4_2: D4.2 R8.2 | length 62.2
  Top Layer w12: D4.2 3004.41,4140 3008.68,4144.27 3010.65,4144.27 3019.41,4153.03 R8.2
NetD5_2: D5.2 R9.2 | length 70.5
  Top Layer w12: D5.2 2974.28,4074.75 2994.16,4074.75 3008.68,4089.27 3010.65,4089.27 3019.41,4098.03 R9.2
NetD6_2: D6.2 R13.2 | length 59.5
  Top Layer w12: D6.2 2974.06,4365 R13.2
NetD7_2: D7.2 R14.2 | length 59
  Top Layer w12: D7.2 2974.53,4280 R14.2
NetD8_2: D8.2 R15.2 | length 87.5
  Top Layer w12: D8.2 2969.75,4530.25 2969.75,4521.63 3014.41,4476.97 R15.2
NetD9_2: D9.2 R16.2 | length 69.4
  Top Layer w12: D9.2 2986.25,4433.28 3006.13,4433.28 R16.2
NetD11_2: D11.2 R18.2 | length 54.9
  Top Layer w10: D11.2 2390.59,4594.88 R18.2
NetD12_2: D12.2 R20.2 | length 56.9
  Top Layer w12: D12.2 3670.12,3879.41 R20.2
NetD13_1: D13.1 D14.2 U3.1 | length 237.8
  Top Layer w10: D13.1 2510.98,4657.99 2538.82,4685.83 U3.1 2614.45,4567.44 D14.2
NetJ1_A5: J1.A5 R3.1 | length 147.3
  Top Layer w10: J1.A5 1809.21,4718.7 1809.21,4694.02 1822,4681.23 1822,4655.47 1835.47,4642 1854.53,4642 1862.53,4650 R3.1
NetJ1_B5: J1.B5 R4.1 | length 74.1
  Top Layer w10: R4.1 1678.54,4654.92 1690.79,4667.17 J1.B5
NetQ3_1: Q3.1 R10.2 | length 81.4
  Top Layer w12: R10.2 1965,4366.06 1993.66,4337.4 Q3.1
NetQ4_1: Q4.1 R11.2 | length 211.1
  Top Layer w12: R11.2 1945,4274.69 1981.91,4311.59 2015.21,4311.59 2081.41,4377.79 2081.41,4404.63 Q4.1
NetR12_2: R12.2 U1.9 | length 93.8
  Top Layer w10: R12.2 1614.92,4395.47 1647.87,4428.43 U1.9
NetR17_1: R17.1 U1.11 | length 93.4
  Top Layer w8: R17.1 1621.18,4335.71 1634.31,4348.83 1634.31,4350.86 1668.75,4385.31 1671.73,4385.31 1675.48,4389.06 U1.11
NetR19_1: R19.1 U2.5 | length 82.7
  Top Layer w10: R19.1 2090.59,4563.82 2099.37,4572.6 U2.5
NetR21_1: R21.1 U5.19 | length 104.1
  Top Layer w12: R21.1 4017.69,4320.59 4032.51,4305.77 4072.45,4305.77 U5.19
RTS_bar: Q3.2 R11.1 U1.24 | length 238.4
  Top Layer w12: U1.24 1886.75,4367.62 1907.19,4367.62 1917.7,4357.11 1917.7,4254.63 1928.25,4244.08 1938.2,4244.08 1945,4237.28 R11.1 1969.33,4236.3 1987.85,4254.82 1987.85,4256.79 1993.66,4262.6 Q3.2
RXD: J4.4 MD1.34 U1.25 | length 2716.2
  Top Layer w8: U1.25 1917.97,4389.06 1923.92,4395 v2(1925,4395)
  Top Layer w12: MD1.34 3903.03,4488.03 v2(3910,4495)
  Bottom Layer w12: v2(1925,4395) 2045,4515 3890,4515 v2(3910,4495) 3939.18,4495 4259.48,4815.3 4300.3,4815.3 J4.4
RXD_2515: U4.4 U5.2 | length 216
  Top Layer w12: U4.4 4170,4235 4240.43,4305.43 U5.2
TXD: J4.3 MD1.35 U1.26 | length 2601.7
  Top Layer w8: U1.26 1913.28,4408.74 1920.09,4415.55 1920.09,4418.38 v2(1920.86,4419.14)
  Top Layer w12: MD1.35 3908.03,4538.03 v2(3915,4545)
  Bottom Layer w8: v2(3915,4545) 3915.77,4545.77 3930.77,4545.77 4048,4663 4054.11,4663 4067,4675.89 4067,4682 J4.3
  Bottom Layer w12: v2(1920.86,4419.14) 2036.72,4535 3905,4535 v2(3915,4545)
TXD_2515: U4.1 U5.1 | length 126.7
  Top Layer w12: U5.1 4319.18,4279.84 4320,4279.02 U4.1
UART_N: J2.2 MD1.27 | length 365.3
  Top Layer w10: MD1.27 3824.49,4150.75 3849.72,4150.75 3852,4153.03 3864.14,4153.03 3980,4037.17 3980,3935.86 3974.14,3930 3972.2,3930 3965.39,3923.19 J2.2
UART_P: J2.1 MD1.28 | length 398.4
  Top Layer w10: MD1.28 3824.49,4175.31 3849.72,4175.31 3852,4173.03 3872.43,4173.03 4000,4045.46 4000,3935.86 4005.86,3930 4007.8,3930 4014.61,3923.19 J2.1
pads on no net: J1. J1.A8 J1.B8 J2.3 J2.4 J3.3 J3.4 J5.3 J5.4 MD1.4 MD1.5 MD1.13 MD1.17 MD1.18 MD1.19 MD1.20 MD1.21 MD1.22 MD1.23 MD1.26 MD1.32 MD1.36 MD1.38 U1.1 U1.2 U1.10 U1.12 U1.13 U1.14 U1.15 U1.16 U1.17 U1.18 U1.19 U1.20 U1.21 U1.22 U1.23 U1.27 U4.5 U5.3 U5.4 U5.5 U5.6 U5.7 U5.11 U5.12 U5.15

## Polygon pours and split planes (outlines as drawn)
3V3_MC on Top Layer "NONET_L-01_P-001" (solid, pour order 3): 2730,4970 2750,4990 4615,4990 4625,4980 4625,3710 4620,3705 2755,3705 2730,3730
+5 on Top Layer "NONET_L-01_P-001" (solid, pour order 2): 2709,4629.42 2709,4971 2690,4990 1520,4990 1510,4980 1510,4195 1520,4185 2685,4185 2710,4210
GND on Bottom Layer "NONET_L-01_P-001" (solid, pour order 1): 1510,4980 1520,4990 4615,4990 4625,4980 4625,3710 4620,3705 1515,3705 1505,3715 1510,3720

## Silkscreen, mask and mechanical layers (free items; w line width, h text height)
Top Overlay:
  text "Battery Charger" at 1995,4939.46 h30
  text "AUX Connector" at 3970,4650.25 h30
  text "5V" at 2285,4205.5 h60
  text "ESP32_CANv1.0" at 1625,4080.66 h60
  text "UART" at 3805,3875.25 h30
  text "CAN" at 4305,3795.25 h30
  text "3V3" at 2820,3730.5 h60
Mechanical 1:
  the board outline again, w10